# Altium PCB PCB_PrimeiroProjeto1_2024-05-18.pcbdoc
Units mil, origin at the board's own origin, x right, y up, seen from the top; angles counter-clockwise.
Board outline 2058.2 x 3600.99 mil, 2 copper layers (Top Layer, Bottom Layer); 19 components, 55 nets, 107 pads, 40 vias.
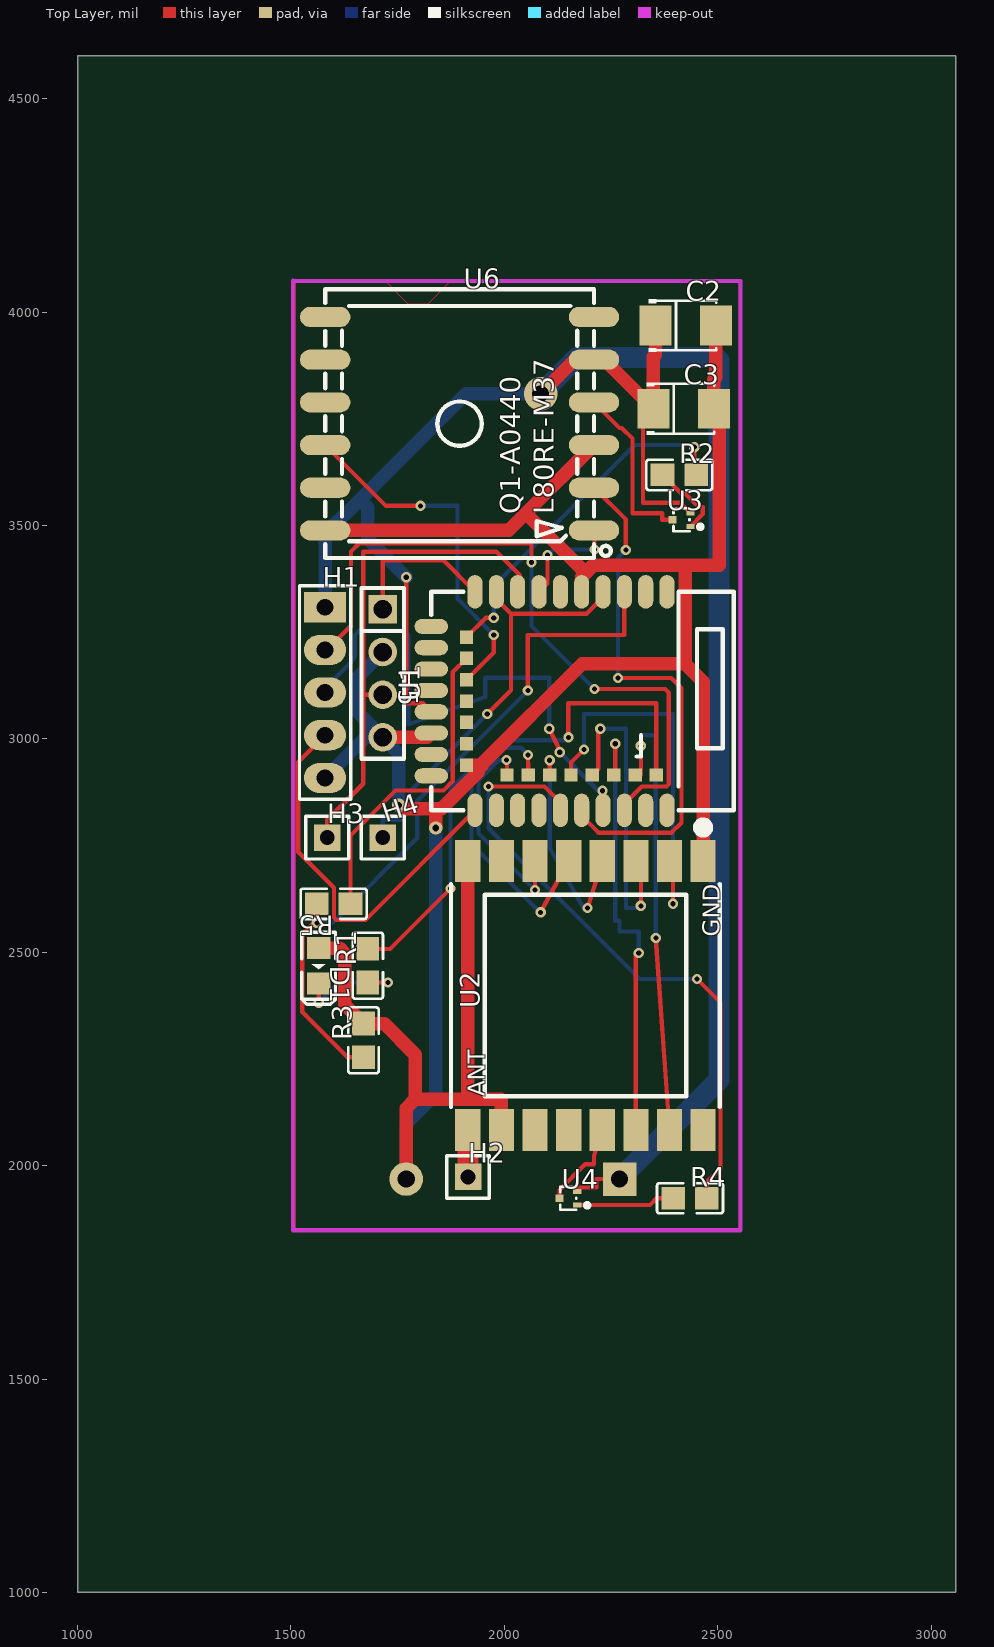
[diagram p0: Top Layer view]
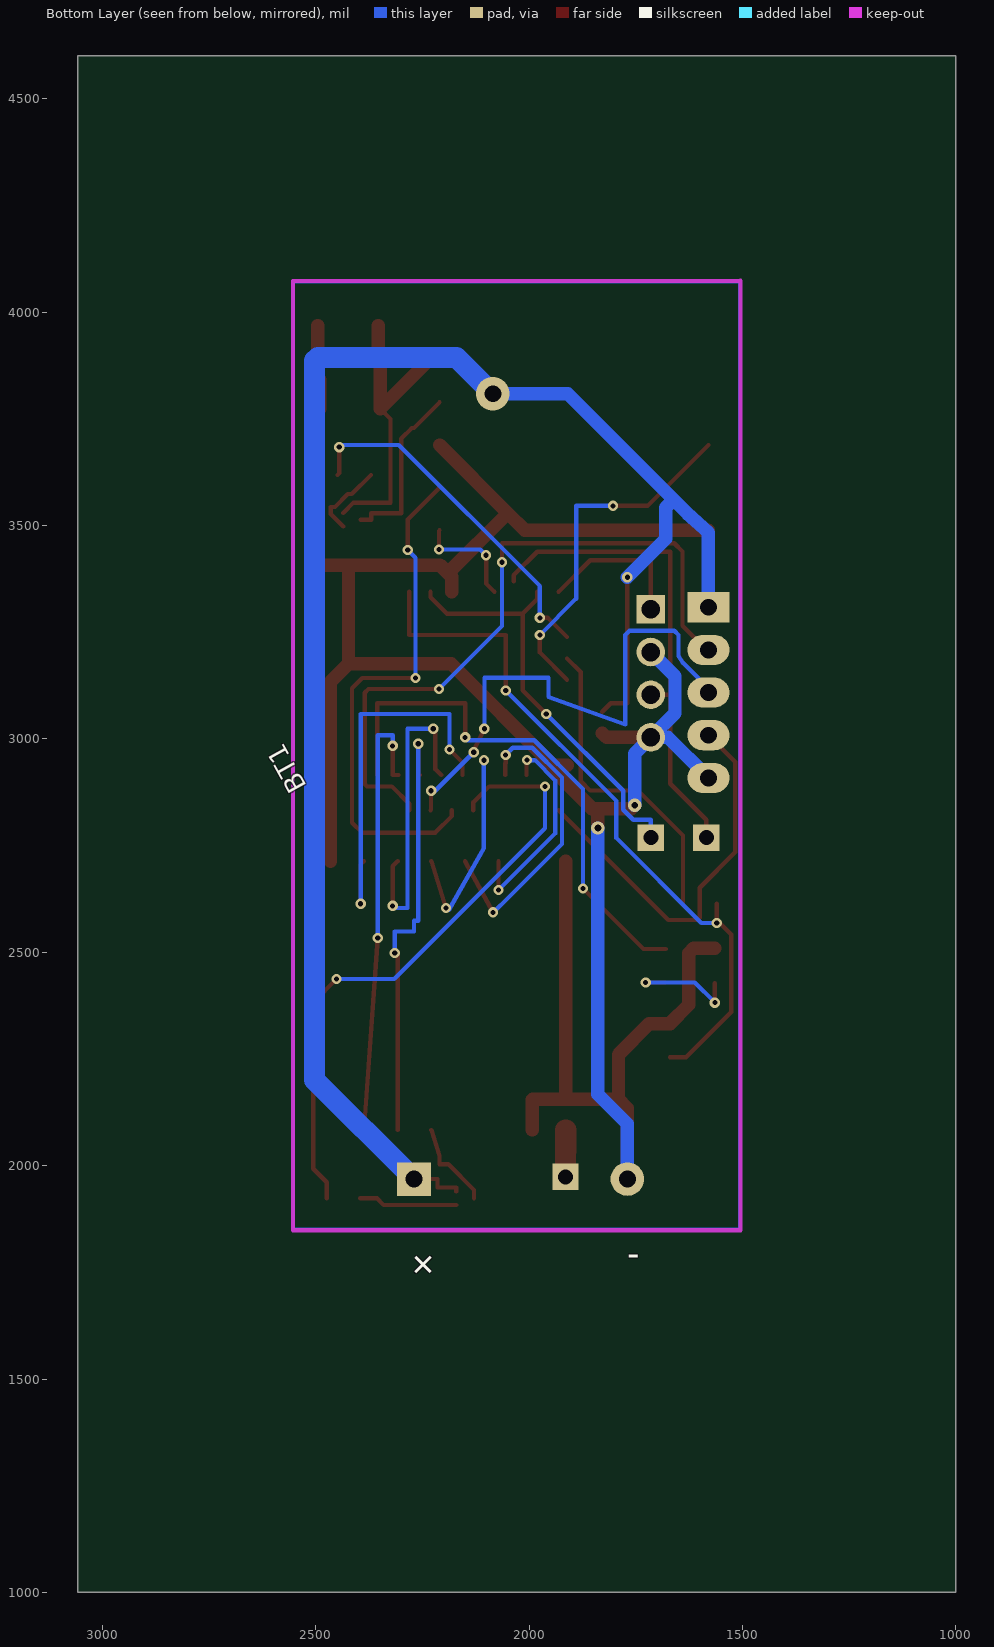
[diagram p1: Bottom Layer view, seen from below]

## Layer stack, top to bottom
Top Layer: signal copper (thickness not stored)
Dielectric: dielectric 12.6, FR-4, Dk 4.8
Bottom Layer: signal copper (thickness not stored)

## Board outline
3058.2,1000 1000,1000 1000,4600.99 3058.2,4600.99

## Components (designator, comment, footprint, x,y, rotation, side; value= is the part's Value field where it differs from the comment)
BT1 "KEYSTONE_2468" KEYSTONE_2468_2XAAA 2020,2728.49 r270 bottom
C2 "10uF" CAP-SMD_L3.5-W2.8-FD 2425,3968.49 r0 top
C3 "10uF" CAP-SMD_L3.5-W2.8-FD 2420,3773.49 r0 top
D1 "LED_0805(2012_METRIC)_L_BLUE" LED0805_BLUE-1 1565,2468.49 r270 top
H1 "HEADER - 2.54_1X5 Right" HEADER-HEADER-FEMALE-2.54_1X5 1580,3308.49 r0 top
H2 "HEADER - 2.54_1X1" HDR-M-2.54_1X1 1915,1973.49 r0 top
H3 "IRSensor" HDR-M-2.54_1X1 1585,2768.49 r0 top
H4 "CapSensor" HDR-M-2.54_1X1 1715,2768.49 r0 top
H5 "Header-Male-2.54_1x4" HDR-TH_4P-P2.54-V-M 1715,3153.49 r270 top
R1 "RESISTOR0805_RESISTOR_C0805" C0805 1680,2468.49 r90 top
R2 "RESISTOR0805_RESISTOR_C0805" C0805 2410,3618.49 r0 top
R3 "RESISTOR0805_RESISTOR_C0805" C0805 1670,2293.49 r90 top
R4 "RESISTOR0805_RESISTOR_C0805" C0805 2435,1923.49 r0 top
R5 "RESISTOR0805_RESISTOR_C0805" C0805 1600,2613.49 r180 top
U1 "E73-2G4M08S1EX" SMD-43_L18.0-W13.0-P1.27-E73-2G4M08S1E 2105,3088.49 r90 top
U2 "SX1276S8S+T-X1" WIRELM-SMD_SX1278S165SY-T-X1 2190,2398.49 r90 top
U3 "SSM3J56MFV,L3F" SOT-723_L1.2-W0.8-P0.80-LS1.2-BR 2415,3513.49 r0 top
U4 "SSM3J56MFV,L3F" SOT-723_L1.2-W0.8-P0.80-LS1.2-BR 2150,1923.49 r0 top
U6 "L80-R" GPSM-SMD_L80-R 1895,3738.49 r0 top

## Footprints (in the part's own frame and the unit in brackets; to place one, negate y for a bottom-side part, rotate by r counter-clockwise, add the part's x,y. Pads: shape width x height; smd on the part's side, far side on the other; paste and mask are expansions set on the pad)
C0805 [mm]
  rect 1.41x1.35 smd paste-100 mask+0.051: 1(-1,0) 2(1,0)
  silkscreen extent -1.96,-0.9 1.96,0.9
CAP-SMD_L3.5-W2.8-FD [mm]
  rect 1.9x2.376 smd paste+0 mask+0.051: 1(-1.799,0) 2(1.799,0)
  silkscreen extent -2.21,-1.55 1.83,1.55
GPSM-SMD_L80-R [mm]
  oval 3x1.2 smd paste+0 mask+0.051: 1(8,-6.35) 2(8,-3.81) 3(8,-1.27) 4(8,1.27) 5(8,3.81) 6(8,6.35) 7(-8,6.35) 8(-8,3.81) 9(-8,1.27) 10(-8,-1.27) 11(-8,-3.81) 12(-8,-6.35)
  silkscreen extent -8,-8 9,8
HDR-M-2.54_1X1 [mil]
  rect 62x62 hole 35 paste+0 mask+2: 1(0,0)
  silkscreen extent -50,-50 50,50
HDR-TH_4P-P2.54-V-M [mm]
  rect 1.7x1.7 hole 1.1 paste+0 mask+0.051: 1(-3.81,0)
  round 1.7 hole 1.1 paste+0 mask+0.051: 2(-1.27,0) 3(1.27,0) 4(3.81,0)
  silkscreen extent -5.08,-1.27 5.08,1.27
HEADER-HEADER-FEMALE-2.54_1X5 [mm]
  rect 2.5x1.8 hole 1 paste+0 mask+0.051: 1(0,0)
  oval 2.5x1.8 hole 1 paste+0 mask+0.051: 2(0,-2.54) 3(0,-5.08) 4(0,-7.62) 5(0,-10.16)
  silkscreen extent -1.52,-11.43 1.52,1.27
KEYSTONE_2468_2XAAA [mm]
  rect 2x2 hole 1.02 paste+0 mask+0.102: 1(19.304,-6.35)
  round 2 hole 1.02 paste+0 mask+0.102: 2(19.304,6.35)
LED0805_BLUE-1 [mil]
  rect 51.2x55.1 smd paste+0 mask+1.97: 1(-41.35,0) 2(41.35,0)
  silkscreen extent -79,-39 91,39
SMD-43_L18.0-W13.0-P1.27-E73-2G4M08S1E [mm]
  oval 2x0.9 smd paste+0 mask+0.05: 1(6.5,-7.015) 2(6.5,-5.745) 3(6.5,-4.475) 4(6.5,-3.205) 5(6.5,-1.935) 6(6.5,-0.665) 7(6.5,0.605) 8(6.5,1.875) 9(6.5,3.145) 10(6.5,4.415) 26(-6.5,4.415) 27(-6.5,3.145) 29(-6.5,1.875) 31(-6.5,0.605) 33(-6.5,-0.665) 35(-6.5,-1.935) 37(-6.5,-3.205) 39(-6.5,-4.475) 41(-6.5,-5.745) 43(-6.5,-7.015)
  oval 0.9x2 smd paste+0 mask+0.05: 11(4.445,7.015) 13(3.175,7.015) 15(1.905,7.015) 17(0.635,7.015) 19(-0.635,7.015) 21(-1.905,7.015) 23(-3.175,7.015) 25(-4.445,7.015)
  rect 0.8x0.8 smd paste+0 mask+0.05: 12(3.81,4.92) 14(2.54,4.92) 16(1.27,4.92) 18(0,4.92) 20(-1.27,4.92) 22(-2.54,4.92) 24(-3.81,4.92) 28(-4.4,2.51) 30(-4.4,1.24) 32(-4.4,-0.03) 34(-4.4,-1.3) 36(-4.4,-2.57) 38(-4.4,-3.84) 40(-4.4,-5.11) 42(-4.4,-6.38)
  silkscreen extent -6.5,-10.98 6.5,7.02
SOT-723_L1.2-W0.8-P0.80-LS1.2-BR [mm]
  rect 0.489x0.294 smd paste+0 mask+0.051: 1(0.529,-0.4) 2(0.529,0.4)
  rect 0.489x0.434 smd paste+0 mask+0.051: 3(-0.529,0)
  silkscreen extent -0.48,-0.68 1.25,0.68
WIRELM-SMD_SX1278S165SY-T-X1 [mm]
  rect 2.5x1.5 smd paste+0 mask+0.051: 1(8,-7) 2(8,-5) 3(8,-3) 4(8,-1) 5(8,1) 6(8,3) 7(8,5) 8(8,7) 9(-8,7) 10(-8,5) 11(-8,3) 12(-8,1) 13(-8,-1) 14(-8,-3) 15(-8,-5) 16(-8,-7)
  silkscreen extent -6.64,-8 10.3,8

## Via types
v1: diameter 24.02, hole 12.01, Top Layer to Bottom Layer, tented both sides, 29 vias
v2: diameter 24.41, hole 12.2, Top Layer to Bottom Layer, tented both sides, 8 vias
v3: diameter 78.74, hole 39.37, Top Layer to Bottom Layer, tented both sides, 1 vias
v4: diameter 31.5, hole 14.96, Top Layer to Bottom Layer, tented both sides, 1 vias
v5: diameter 31.5, hole 15.75, Top Layer to Bottom Layer, tented both sides, 1 vias

## Nets (pads, with @x,y where several pads share a name; then routed paths per layer and width w, separated by ;. In a path a pad name is that pad's centre, name@x,y a point inside that pad or via, vN(x,y) a via of type N, cw(c..) or ccw(c..) an arc to the next point about the centre after c; other vN are vias at no path point)
CAP: H4.1 U1.4 U1.9 | length 983.1
  Top Layer w10: v1(1960,3058.49) 2015.4,3113.89 2015.4,3293.2 ; U1.9 1981.17,3327.47 2015.45,3293.18 2192.57,3293.18 2231.17,3331.78 U1.4
  Bottom Layer w10: H4.1 1715,2810.49 1756.3,2810.49 1779.8,2833.99 1779.8,2878.3 v1(1960,3058.49)
CLOCK: U1.32 U2.4 | length 530.1
  Top Layer w10: U1.32 2106.17,2942.01 v1(2106.17,2949.91) ; v1(2195,2603.49) U2.4
  Bottom Layer w10: v1(2106.17,2949.91) 2106.2,2744.2 2187.8,2599.39 v1(2195,2603.49)
DIO0: U1.38 U2.14 | length 1043.9
  Top Layer w10: U1.38 2260,2915.26 v2(2260,2988.49) ; U2.14 2308.1,2498.49 v1(2315,2498.49)
  Bottom Layer w10: v2(2260,2988.49) 2260,2573.49 2270,2573.49 2270,2548.49 2315,2548.49 v1(2315,2498.49)
DIO1: U1.40 U2.15 | length 1068.2
  Top Layer w10: U1.40 2320,2915.26 v2(2320,2983.49) ; v1(2355,2533.49) U2.15@2386.9,2083.49
  Bottom Layer w10: v2(2320,2983.49) 2320,3008.49 2355,3008.49 v1(2355,2533.49)
GND: BT1.2 C2.2 C3.2 D1.1 H1.5 H5.2 H5.4 R3.2 U1.5 U1.21 U1.24 U2.1 U2.8 U2.10 U6.3 U6.12 | length 6592.2
  Top Layer w31.5: D1.1 1614.29,2509.84 1626.29,2497.84 1626.29,2376.57 R3.2 1718.32,2332.86 1790.73,2260.45 1790.73,2155.55 ; U6.12 2009.96,3488.49 2050.25,3528.78 ; H5.4 1818.81,3003.49 U1.21 ; v4(1752.77,2844.86) 1760.9,2836.74 1839.05,2836.74 ; BT1.2 1770.01,2134.84 1790.73,2155.56 ; v5(1839.05,2791.11) 1839.05,2836.74 ; U1.24 1938.48,2938.49 ; U2.8 1914.41,2642.51 1914.41,2155.55 ; U2.10@1993.15,2083.53 1993.15,2154.49 1992.08,2155.55 1914.41,2155.55 ; U1.5 2181.17,3379.39 2190.4,3388.62 ; U6.3 2050.25,3528.78 ; 2417.3,3407.3 2503.2,3407.3 2503.2,3795.39 C3.2@2490.8,3807.8 ; U2.1 2465.59,3133.99 2423.36,3176.22 ; C3.2 2490.81,3807.76 2490.81,3842.01 2495.81,3847.01 C2.2 ; 1790.73,2155.55 1914.41,2155.55 ; 1839.05,2836.74 1852.94,2836.74 1938.49,2922.28 1938.49,2938.49 ; 1938.49,2938.49 1948.78,2938.49 1948.78,2942.39 2182.6,3176.22 2423.36,3176.22 ; 2050.25,3528.78 2190.4,3388.62 ; 2190.4,3388.62 2209.03,3407.26 2417.33,3407.26 2423.36,3401.22 2423.36,3176.22
  Bottom Layer w31.5: H1.5 1675,3003.49 H5.4 ; H5.2 1658.43,3146.93 1658.43,3060.07 H5.4 ; v4(1752.77,2844.86) 1752.77,2965.72 H5.4 ; BT1.2 1770,2098.49 1839.05,2167.55 v5(1839.05,2791.11)
GPS-PWR: R2.2 U1.12 | length 835.5
  Top Layer w10: U1.12 1956.29,3283.49 v1(1975,3283.49) ; v1(2445,3683.49) 2445,3622.86 R2.2
  Bottom Layer w10: v1(1975,3283.49) 1975,3357.84 2305.66,3688.49 2445,3688.49 v1(2445,3683.49)
GPS-RST: U1.16 U6.10 | length 838
  Top Layer w10: U6.10 1722.61,3545.93 v1(1803.38,3545.93) ; U1.16 1975,3202.21 v1(1975,3243.49)
  Bottom Layer w10: v1(1803.38,3545.93) 1890,3545.92 1890,3328.49 v1(1975,3243.49)
LED: R1.2 U1.42 | length 1266.4
  Top Layer w10: R1.2 1732.34,2507.86 v1(1873.76,2649.28) ; v1(2150,3003.49) 2150,3083.49 2356.2,3083.49 2356.2,2941.99 ; U1.42 2356.17,2942.01
  Bottom Layer w10: v1(1873.76,2649.28) 1873.76,2882.57 1988.02,2996.82 2143.33,2996.82 v1(2150,3003.49)
LORA_PWR: R4.2 U1.33 | length 1484.8
  Top Layer w10: v1(1962.85,2888.47) 2093.9,2888.47 2131.18,2851.18 U1.33 ; v1(2451.51,2437.24) 2506.18,2382.57 2506.18,1992.88 2474.37,1961.07 R4.2
  Bottom Layer w10: v1@1962.9,2888.49 1962.9,2790.7 2316.3,2437.2 v1(2451.51,2437.24)
MISO: U1.36 U2.3 | length 745.9
  Top Layer w10: U1.36 2220,2929.09 2220,3023.49 v2(2225,3023.49) ; U2.3 2320,2701.57 v2(2320,2608.49)
  Bottom Layer w10: v2(2225,3023.49) 2285,3023.49 2285,2603.49 2315,2603.49 v2(2320,2608.49)
MOSI: U1.34 U2.2 | length 912.6
  Top Layer w10: U1.34 2156.17,2942.01 2156.17,2944.57 v1(2186.59,2974.99) ; U2.2@2386.85,2713.46 2395,2705.31 v1(2395,2613.49)
  Bottom Layer w10: v1(2186.59,2974.99) 2186.6,3058.49 2395,3058.49 v1(2395,2613.49)
NSS: U1.30 U2.5 | length 735.3
  Top Layer w10: v1(2055.19,2962.45) 2055.19,2942.99 2056.17,2942.01 U1.30 ; v1(2085,2593.49) U2.5
  Bottom Layer w10: v1@2055.2,2962.49 2038.7,2978.99 1992.9,2978.99 1923.2,2909.3 1923.2,2753.89 2068.4,2608.7 v1(2085,2593.49)
NTC: R3.1 R5.2 U1.3 | length 1687.1
  Top Layer w10: R5.2 v1(1560.63,2568.78) 1553.48,2568.78 1526.39,2541.7 1526.39,2360.18 1632.44,2254.12 R3.1 ; v1(2055,3113.49) 2055,3243.49 2281.2,3243.49 U1.3
  Bottom Layer w10: v1(1560.63,2568.78) 1597,2568.8 1795.8,2767.59 1795.8,2854.3 v1(2055,3113.49)
NTC_VCC: R5.1 U1.14 | length 753.4
  Top Layer w10: R5.1 1639.37,2651.07 1639.37,2773.41 1744.93,2878.97 1857.26,2878.97 1879.24,2900.95 1879.24,3156.45 U1.14
R1_1: D1.2 R1.1 | length 274.1
  Top Layer w10: v1(1565,2381.93) D1.2 ; R1.1 v1(1727.18,2429.11)
  Bottom Layer w10: v1(1565,2381.93) 1612.18,2429.11 v1(1727.18,2429.11)
RST: U1.28 U2.6 | length 500.2
  Top Layer w10: v1(2005.01,2950.18) 2005.01,2943.16 2006.17,2942.01 U1.28 ; v1(2071.89,2645.86) U2.6
  Bottom Layer w10: v1(2005.01,2950.18) 1986.77,2950.18 1939.24,2902.64 1939.24,2778.51 v1(2071.89,2645.86)
RX: U1.35 U6.2 | length 1231.1
  Top Layer w10: U1.35 2181.2,2819.3 2220.2,2780.3 2392,2780.3 2415.1,2803.3 2415.1,3118.39 2391.1,3142.39 v1(2266.49,3142.41) ; U6.2 2284.71,3513.74 v1(2284.71,3442.47)
  Bottom Layer w10: v1(2266.49,3142.41) 2266.49,3424.26 v1(2284.71,3442.47)
S1: H5.1 U1.10 | length 361.9
  Top Layer w10: H5.1 1715,3418.49 1857.1,3418.49 U1.10
S2: H3.1 H5.3 U1.8 | length 1154.1
  Top Layer w10: H3.1 1585,2810.49 1669.48,2894.97 1669.48,3103.49 ; H5.3 1669.48,3103.49 ; U1.8@2036.2,3369.39 2036.2,3383.59 1981.2,3438.49 1669.5,3438.49 1669.5,3103.49
TX: U1.7 U6.1 | length 255.2
  Top Layer w10: U1.7 2100.96,3364.2 v1(2100.96,3430.24) ; U6.1 2211.35,3487.11 v1(2211.35,3443.95)
  Bottom Layer w10: v1(2100.96,3430.24) 2114.66,3443.95 v1(2211.35,3443.95)
U1_1: U1.1
U1_2: U1.2
U1_6: U1.6
U1_11: U1.11
U1_13: U1.13
U1_15: U1.15
U1_17: U1.17
U1_18: U1.18
U1_20: U1.20
U1_22: U1.22
U1_23: U1.23
U1_25: U1.25
U1_26: H1.4 U1.26 | length 927.2
  Top Layer w10: H1.4 1517.06,2945.55 1517.06,2734.62 1600.56,2651.12 1600.56,2581.16 1605.96,2575.76 1674.35,2575.76 U1.26
U1_27: U1.27
U1_29: U1.29
U1_31: U1.31
U1_37: H1.3 U1.37 | length 1257.1
  Top Layer w10: v2(2105,3023.49) 2130,2973.49 v2(2130,2968.49) ; v2(2230,2878.49) 2230,2833.77 U1.37
  Bottom Layer w10: H1.3 1585,3113.49 1585,3123.49 1625,3163.49 1640,3178.49 1650,3193.49 1650,3243.49 1660,3253.49 1765,3253.49 1775,3243.49 1775,3033.49 1955,3098.49 1955,3143.49 2105,3143.49 v2(2105,3023.49) ; v2(2130,2968.49) 2220,2878.49 v2(2230,2878.49)
U1_39: H1.2 U1.39 | length 1622.4
  Top Layer w10: H1.2 1584.1,3208.49 1640.6,3264.89 1640.6,3439.09 1660,3458.49 2063.6,3458.49 v1(2063.61,3413.84) ; v1(2211.41,3116.78) 2376.7,3116.8 2385.4,3108.09 2385.4,2893.99 2379.8,2888.39 2321.8,2888.39 2281.2,2847.89 U1.39
  Bottom Layer w10: v1(2063.61,3413.84) 2063.61,3264.59 v1(2211.41,3116.78)
U1_41: U1.41
U1_43: U1.43
U2_7: U2.7
U2_9: H2.1 U2.9 | length 110
  Top Layer w49.37: U2.9 H2.1
U2_11: U2.11
U2_12: U2.12
U2_13: U2.13 U4.3 | length 208.5
  Top Layer w10: U4.3 2129.15,1943.03 ; 2129.2,1942.99 2189.6,2003.49 2210,2003.49 2210,2023.3 U2.13
U2_16: U2.16
U3_1: R2.1 U3.1 | length 183.3
  Top Layer w10: R2.1 2415.63,3573.49 2425,3573.49 2455,3543.49 2465,3543.49 2465,3526.89 U3.1
U4_1: R4.1 U4.1 | length 231.3
  Top Layer w10: U4.1 2341.13,1907.74 2356.88,1923.49 R4.1
U6_4: U3.3 U6.4 | length 410.2
  Top Layer w10: U6.4 2269.96,3728.49 2275,3728.49 2300,3703.49 2300,3528.49 2370,3528.49 2370,3513.49 U3.3@2395,3513.49
U6_6: U6.6
U6_7: U6.7
U6_8: U6.8
U6_9: U6.9
U6_11: U6.11
VCC: BT1.1 C2.1 C3.1 H1.1 U1.19 U3.2 U4.2 U6.5 | length 4889.2
  Top Layer w10: v2(1770,3378.49) 1770,3083.49 1808.8,3083.49 U1.19 ; U4.2 2170.85,1948.49 2215,1948.49 2215,1968.49 BT1.1 ; C3.1 2325,3749.3 2325,3553.49 2411.6,3553.49 U3.2
  Top Layer w31.5: v3(2085,3808.49) 2165,3888.49 U6.5 2234.19,3888.49 C3.1 2349.19,3894.99 2354.19,3899.99 C2.1
  Bottom Layer w31.5: H1.1 1580,3483.49 1630,3528.49 1910,3808.49 v3(2085,3808.49) ; 1664.48,3557.62 1680,3542.1 1680,3468.49 v2(1770,3378.49)
  Bottom Layer w49.37: v3(2085,3808.49) 2170,3893.49 2495,3893.49 2502.6,3885.89 2502.6,2201.09 BT1.1

## Polygon pours and split planes (outlines as drawn)
GND on Top Layer (solid): 1510,4068.49 1510,1853.49 2550,1853.49 2550,4068.49 1870,4068.49 1820,4018.49 1775,4018.49 1725,4068.49 1510,4068.49
GND on Bottom Layer (solid): 1510,4068.49 1510,1853.49 2550,1853.49 2550,4068.49 1510,4068.49

## Silkscreen, mask and mechanical layers (free items; w line width, h text height)
Top Overlay:
  lines w10 net DIO1: 2310,2958.49 2320,2958.49 2320,3008.49

## Text inside footprints (layer, text, board x,y; h text height)
BT1: Document "-" at 1770,2474.4 h59.05 r180; Document "+" at 1790.88,3315.75 h59.05 r135; Document "+" at 2239.12,2439.37 h59.05 r225; Document "-" at 2270,3324.4 h59.05 r180; Bottom Overlay "+" at 2290.88,1774 h59.05 r45; Bottom Overlay "-" at 1770,1765.35 h59.05
U2: Top Overlay "GND" at 2504.97,2536.3 h39.37 r90; Top Overlay "ANT" at 1953.78,2162.28 h39.37 r90
U6: Top Overlay "L80RE-M37" at 2115.83,3525.93 h47.24 r90; Top Overlay "Q1-A0440" at 2036.73,3525.89 h47.24 r90